# EAGLE board mains_module (EAGLE 8.4.1)
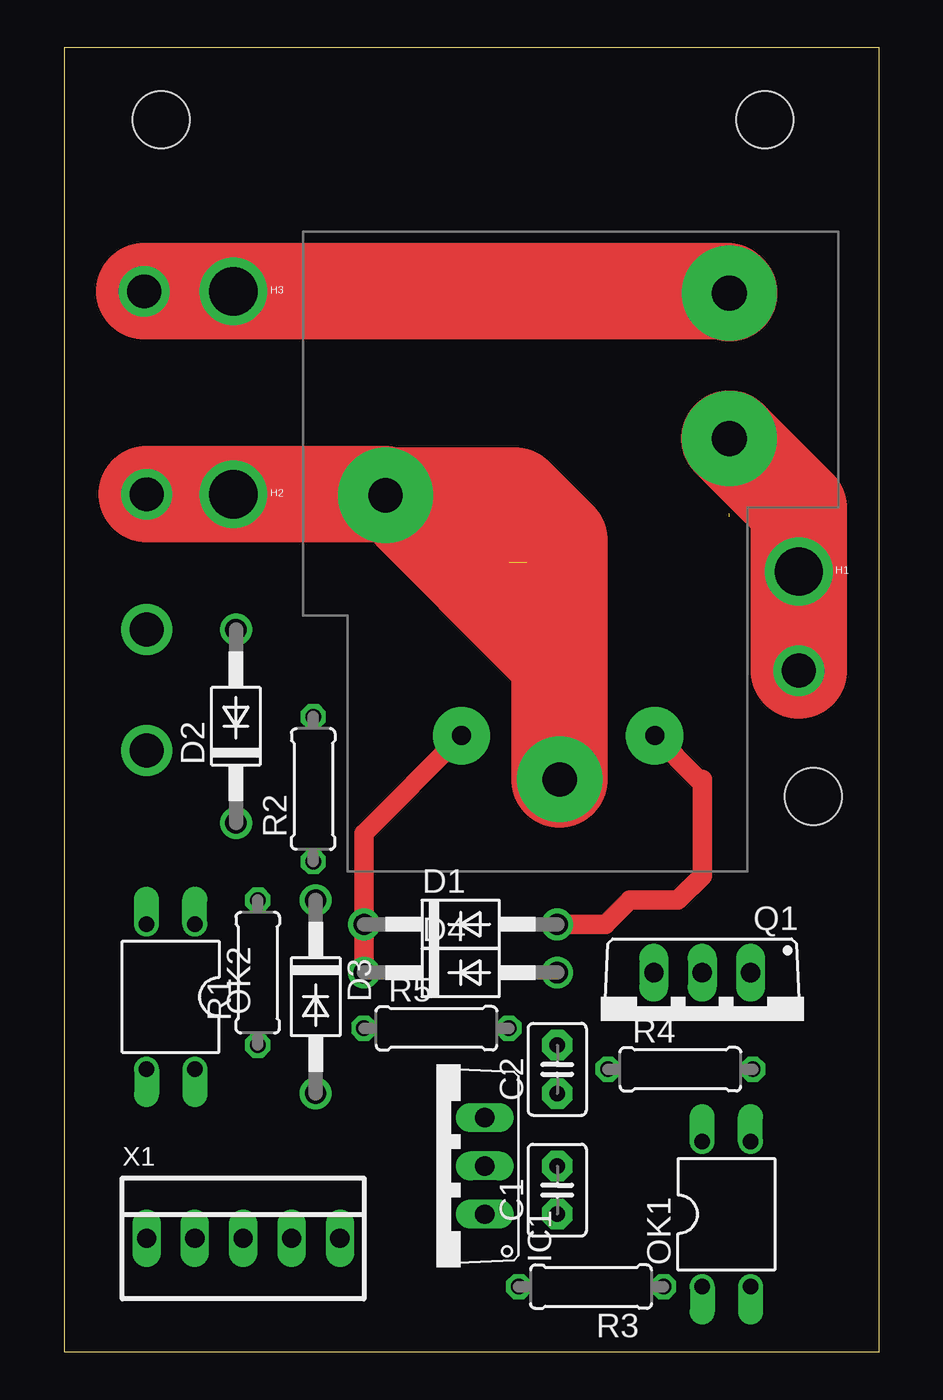
[diagram p0: board, top side]
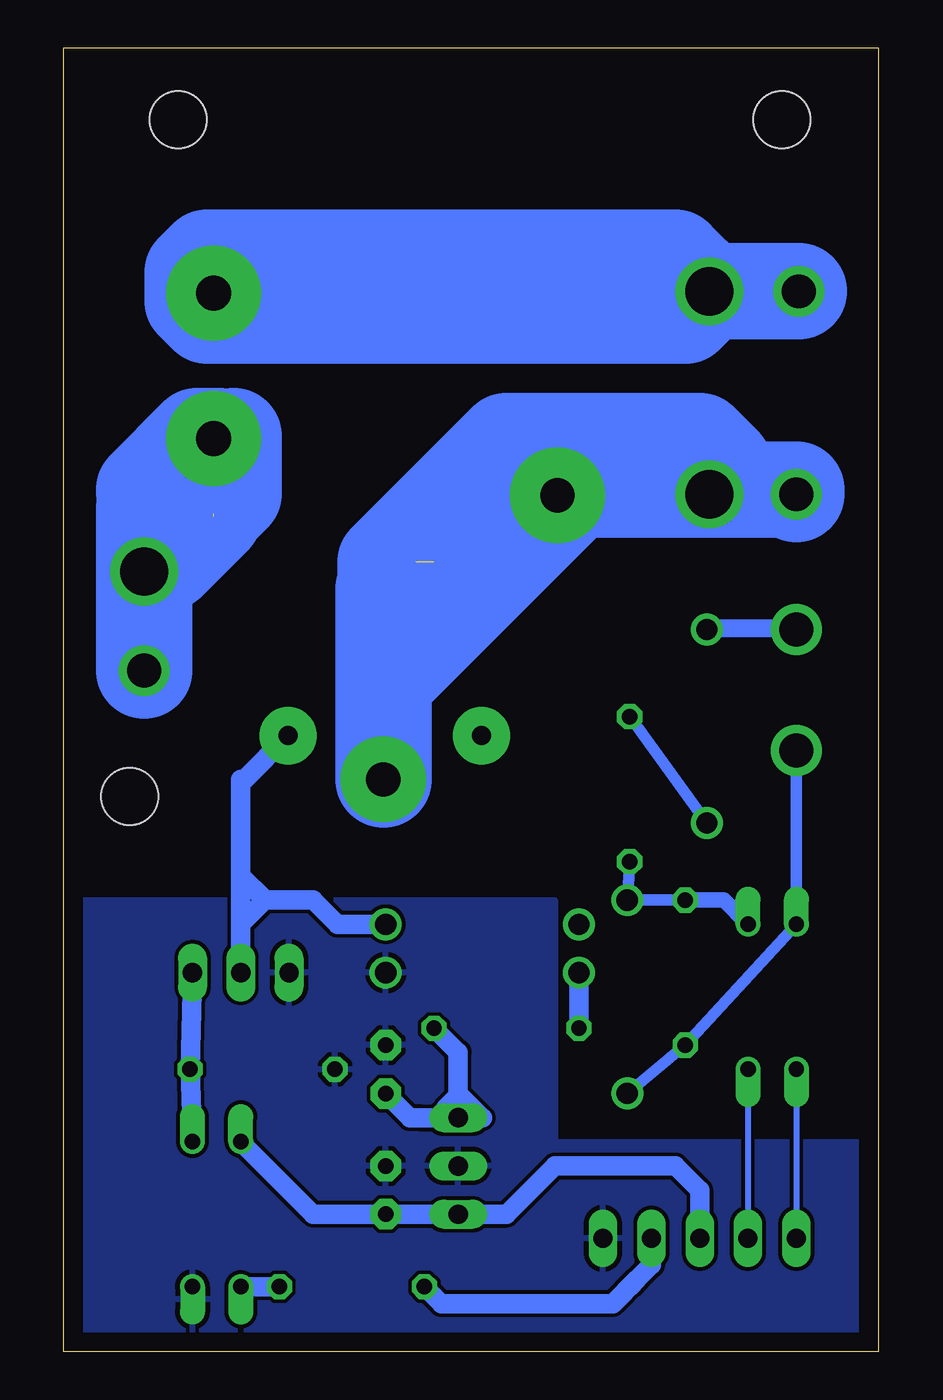
[diagram p1: board, bottom side, seen from below]

Size 42.85 x 68.57 mm. Coordinates in mm from the lower left corner, seen from the top.
Outline: 0,0 42.85,0 42.85,68.57 0,68.57 0,0
Copper layers (1*16): Top 0.035mm / dielectric 1.5mm / Bottom 0.035mm
Design rules "default": minimum track width 10mil, minimum drill 24mil, track to track 8mil, track to pad 8mil, pad to pad 8mil, via to via 8mil, smd to smd 8mil, copper to edge 40mil, drill to drill 8mil, minimum pad ring 10mil, minimum via ring 8mil, stop-mask expansion 4mil, vias tented up to drill 0mil, thermal gap 10mil
Holes 3 mm at 5.08,64.77 36.83,64.77 39.37,29.21

## Footprints (pad centres in the part's own frame; a part is rotated, then mirrored left to right if it is on the bottom)
C2.5-3 = drill 0.813 pad 1.6 octagon: 1 -1.27,0; 2 1.27,0
DO41-10 = drill 1.118: A 5.08,0; C -5.08,0
SIMPLE_HOLE = drill 2.54 pad 3.048: P$1 0,0
SIMPLE_HOLE_SM = drill 1.778 pad 2.286: P$1 0,0
TO220V = drill 1.016 long: 1 -2.54,-2.54; 2 0,-2.54; 3 2.54,-2.54
DIL04 = drill 0.813 offset: 1 -1.27,-3.81; 2 1.27,-3.81; 3 1.27,3.81; 4 -1.27,3.81
TO220BV = drill 1.016 long: D 0,-2.54; G -2.54,-2.54; S 2.54,-2.54
0207/7 = drill 0.813 octagon: 1 -3.81,0; 2 3.81,0
T-TYPE-RELAY-30A = drill 1.8 pad 4.5: C1 18.925,35.56 | drill 1.8 pad 5: C2 28.08,20.63 | drill 1 pad 3: COIL1 13.925,33.265; COIL2 24.085,33.265 | drill 1.85 pad 5: NC 10,10; NO 10,17.645
22-23-2051 = drill 1 long: 1 -5.08,0; 2 -2.54,0; 3 0,0; 4 2.54,0; 5 5.08,0

## Placement (x,y rotation side)
C1  [C2.5-3]  25.91,8.51 90 top
C2  [C2.5-3]  25.91,14.86 90 top
D1  1N4004  [DO41-10]  20.83,22.48 0 top
D2  1N4004  [DO41-10]  9.02,32.89 90 top
D3  1N4004  [DO41-10]  13.21,18.67 270 top
D4  1N4004  [DO41-10]  20.83,19.94 0 top
H1  SEW_HOLE  [SIMPLE_HOLE]  38.61,41.02 0 top
H2  SEW_HOLE  [SIMPLE_HOLE]  8.89,45.09 0 top
H3  SEW_HOLE  [SIMPLE_HOLE]  8.89,55.75 0 top
H4  SEW_HOLE-SMALL  [SIMPLE_HOLE_SM]  38.61,35.81 0 top
H5  SEW_HOLE-SMALL  [SIMPLE_HOLE_SM]  4.32,45.09 0 top
H6  SEW_HOLE-SMALL  [SIMPLE_HOLE_SM]  4.19,55.75 0 top
H7  SEW_HOLE-SMALL  [SIMPLE_HOLE_SM]  4.32,31.62 0 top
H8  SEW_HOLE-SMALL  [SIMPLE_HOLE_SM]  4.32,37.97 0 top
IC1  7805TV  [TO220V]  19.56,9.78 90 top
OK1  PC817  [DIL04]  34.8,7.24 0 top
OK2  PC817  [DIL04]  5.59,18.67 180 top
Q1  IRF540  [TO220BV]  33.53,17.4 180 top
R1  [0207/7]  10.16,19.94 90 top
R2  [0207/7]  13.08,29.59 90 top
R3  [0207/7]  27.69,3.43 180 top
R4  [0207/7]  32.38,14.86 0 top
R5  [0207/7]  19.56,17.02 0 top
RLY1  T-TYPE-RELAY-30A  [T-TYPE-RELAY-30A]  44.96,65.66 180 top
X1  22-23-2051  [22-23-2051]  9.4,5.97 0 top

## Library data of the parts
C1 C2 = capacitor-wima
D1-D4 = diode
H1-H8 = LilyPad-Wearables
IC1 = linear
OK1 OK2 = optocoupler; MPN: PC817X4J000F; OC_FARNELL: 9707727; OC_NEWARK: 97K7059
Q1 = transistor-power
R1-R5 = rcl
RLY1 = T-type-relay
X1 = con-molex; MF: MOLEX; MPN: 22-23-2051; OC_FARNELL: 1462952; OC_NEWARK: 38C9178

## Nets
12V: C1.1 IC1.1 OK1.4 X1.3
GND: C1.2 C2.2 D4.A IC1.2 OK1.2 Q1.S R4.1 X1.5
N$1: OK2.3 X1.1
N$2: OK2.4 X1.2
N$3: H1.P$1 H4.P$1 RLY1.NO
N$4: OK1.1 R3.1
N$5: D1.A Q1.D RLY1.COIL1
N$6: R3.2 X1.4
N$7: OK1.3 Q1.G R4.2
N$8: D2.C R2.2
N$9: H3.P$1 H6.P$1 RLY1.NC
N$10: D2.A H8.P$1
N$12: D3.C OK2.1 R1.2 R2.1
N$13: D3.A H7.P$1 OK2.2 R1.1
N$14: H2.P$1 H5.P$1 RLY1.C1 RLY1.C2
REG_V: C2.1 IC1.3 R5.2
RLY_V: D1.C D4.C R5.1 RLY1.COIL2

## Tracks (layer width: path | path; a pad name or v marks a point on that pad's centre or on a via)
12V
  Bottom 1.016: OK1.4 29.72,7.24 C1.1 IC1.1 19.56,7.24 17.02,9.78 10.67,9.78 9.4,8.51 X1.3
GND
  pour Bottom: 0.51,11.05 0.51,-1.65 42.42,-1.65 42.42,23.75 17.02,23.75 17.02,11.05
N$1
  Bottom 0.305: OK2.3 X1.1
N$2
  Bottom 0.305: OK2.4 X1.2
N$3  (1 unrouted)
  Top 5.08: H4.P$1 H1.P$1 38.61,44.36 RLY1.NO
  Bottom 5.08: RLY1.NO 38.61,44.36 H4.P$1 | RLY1.NO 34.96,43.91 37.34,41.53 37.34,45.63 RLY1.NO | RLY1.NO 34.96,47.78 34.42,47.24 34.42,47.88 34.67,48.13 35.81,48.13 38.61,45.34 38.61,45.21 | 34.96,44.07 33.91,45.12 33.91,48.13
N$4
  Bottom 1.016: R3.1 OK1.1
N$5
  Top 1.016: RLY1.COIL1 33.33,30.1 33.53,30.1 33.53,25.02 32.26,23.75 29.72,23.75 28.45,22.48 D1.A
  Bottom 1.016: 30.99,32.35 RLY1.COIL1 33.33,30.1 33.53,30.1 33.53,25.02 | D1.A 28.45,22.48 29.72,23.75 32.26,23.75 | 33.53,25.02 33.53,22.48 | 33.53,22.48 Q1.D | 32.26,23.75 33.53,22.48 | 32.26,23.75 33.53,25.02
N$6
  Bottom 1.016: X1.4 11.94,4.57 12.7,3.81 | 12.7,3.81 13.08,3.43 | 12.7,3.81 13.97,2.54 22.99,2.54 R3.2
N$7
  Bottom 1.016: OK1.3 R4.2 Q1.G
N$8
  Bottom 0.61: R2.2 D2.C
N$9
  Top 5.08: H6.P$1 H3.P$1 34.86,55.75 RLY1.NC
  Bottom 5.08: H6.P$1 9.4,55.75 9.49,55.66 RLY1.NC 33.78,54.48 | 33.78,54.48 10.16,54.48 H3.P$1 10.67,57.53 35.31,57.53 36.07,56.77 36.07,55.24 | 36.07,55.24 33.78,55.24 33.53,54.99 | 33.78,54.48 35.31,54.48 36.07,55.24
N$10
  Bottom 0.813: D2.A H8.P$1 4.45,38.1 8.89,38.1
N$12
  Bottom 0.61: R1.2 D3.C R2.1
  Bottom 0.813: OK2.1 8.13,23.75 R1.2
N$13
  Bottom 0.61: D3.A R1.1 OK2.2 H7.P$1
N$14  (1 unrouted)
  Top 5.08: H5.P$1 H2.P$1 16.82,45.09 RLY1.C2 23.68,45.03 26.03,42.67 26.03,36.32 | RLY1.C1 26.03,33.91 26.03,36.32 | 20.83,45.03 24.33,41.53 24.64,41.53 | 24.64,37.72 26.03,37.72 | 24.64,37.72 18.29,44.07 | 26.03,36.32 24.64,37.72
  Bottom 0.305: 23.37,41.53 25.91,41.53 22.35,45.09 H2.P$1
  Bottom 5.08: 16.57,45.34 RLY1.C2 17.19,45.34 18.41,45.34 | 16.57,45.34 8.13,45.34 | 8.13,45.34 4.32,45.34 H5.P$1 | 22.1,45.34 18.41,45.34 | 22.1,45.34 25.91,41.53 25.91,40.26 26.03,40.13 26.03,38.86 | RLY1.C1 26.03,35.18 | 26.03,35.18 26.03,37.72 | 20.83,44.07 23.37,41.53 26.03,38.86 | 26.03,38.86 26.03,37.72 | 26.03,37.72 18.41,45.34 | 26.03,35.18 16.57,44.64 16.57,45.34 | 8.13,45.34 8.13,46.61 9.4,47.88 19.56,47.88 22.1,45.34
REG_V
  Bottom 0.813: 22.1,13.59 22.86,12.83 22.86,12.7 23.24,12.32 24.13,12.32
  Bottom 1.016: C2.1 24.64,12.32 24.13,12.32 IC1.3 20.83,12.32 22.1,13.59 22.1,15.75 R5.2
RLY_V
  Top 1.016: D4.C D1.C 15.75,27.27 RLY1.COIL2
  Bottom 1.016: D4.C R5.1